# EAGLE board Sketch2 (EAGLE 7.5.0)
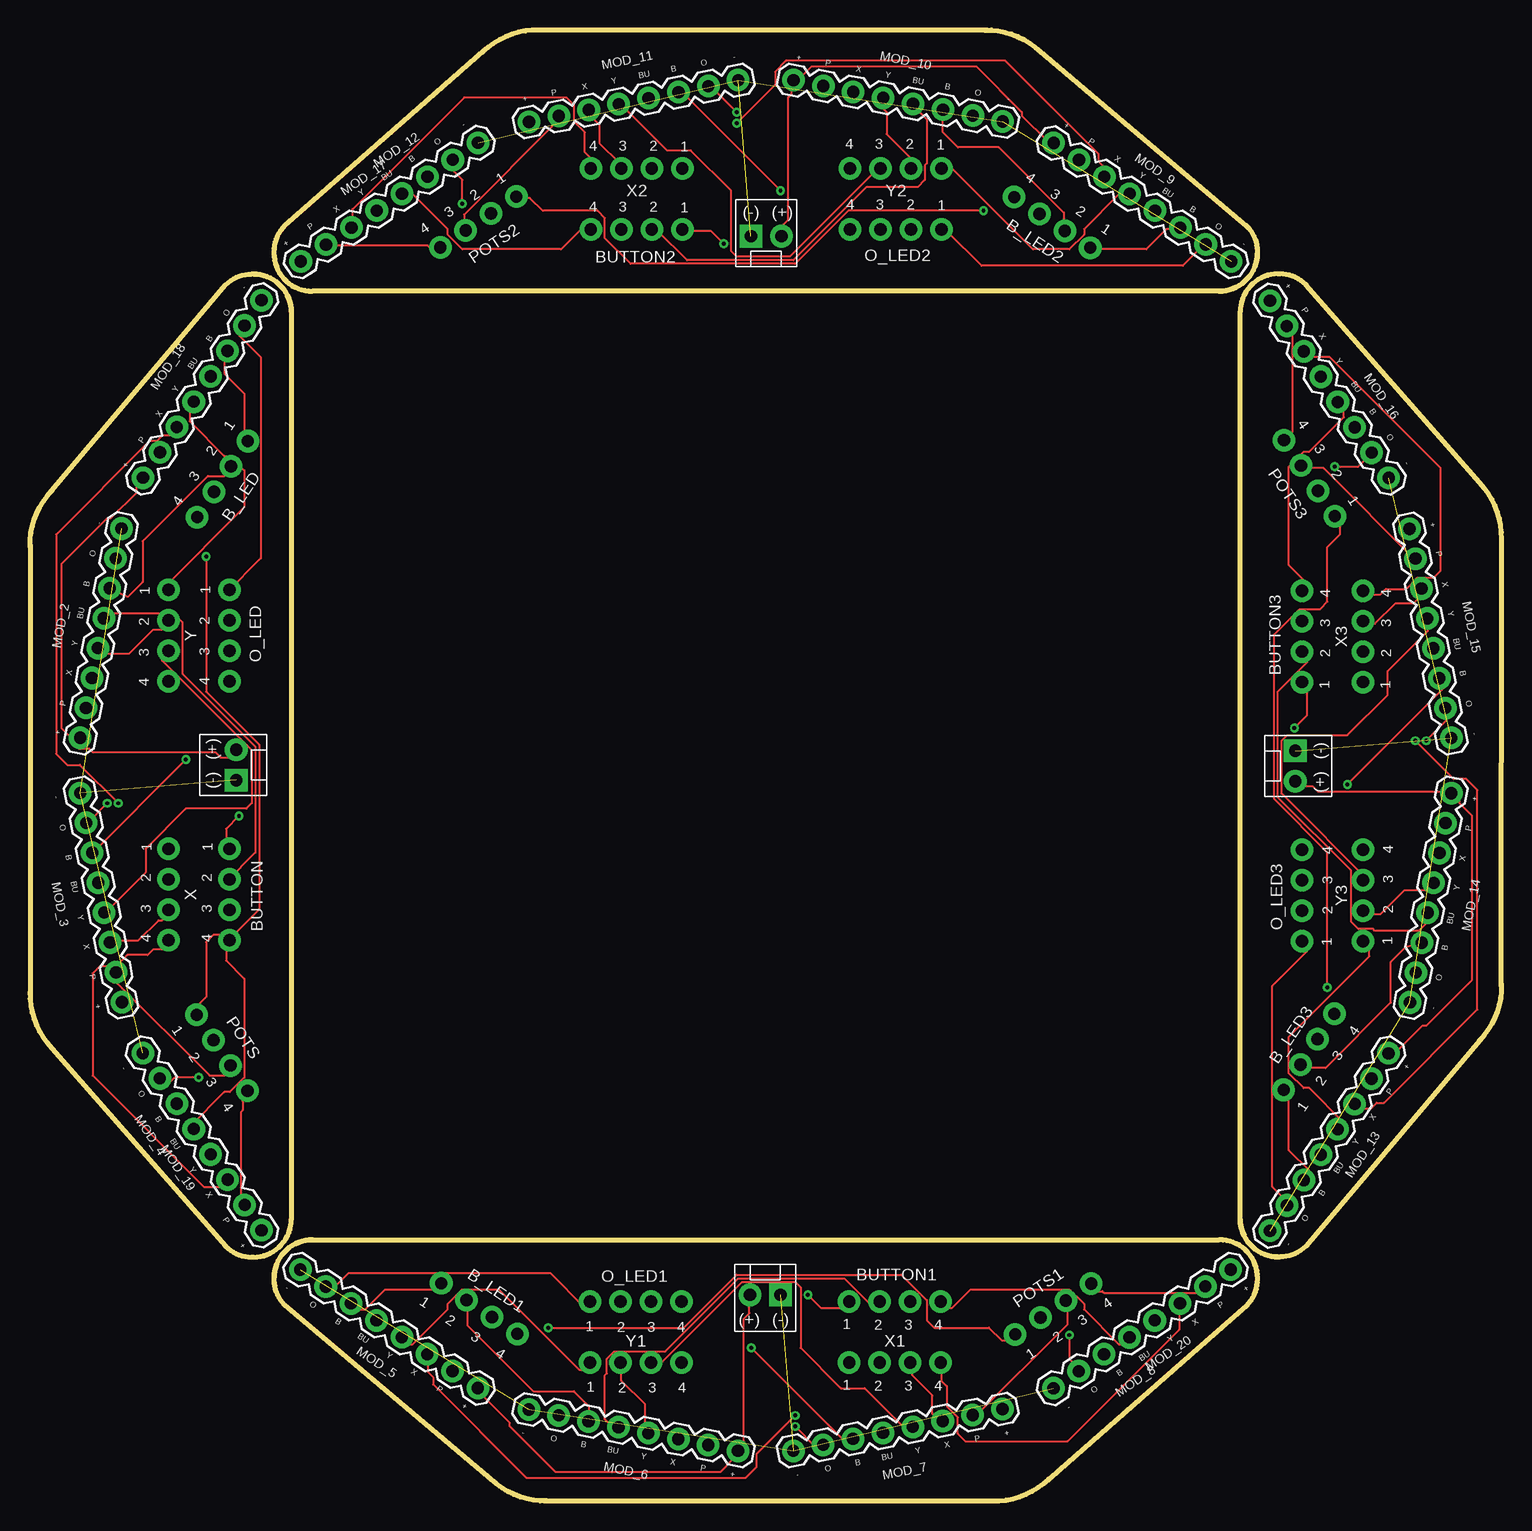
[diagram p0: board, top side]
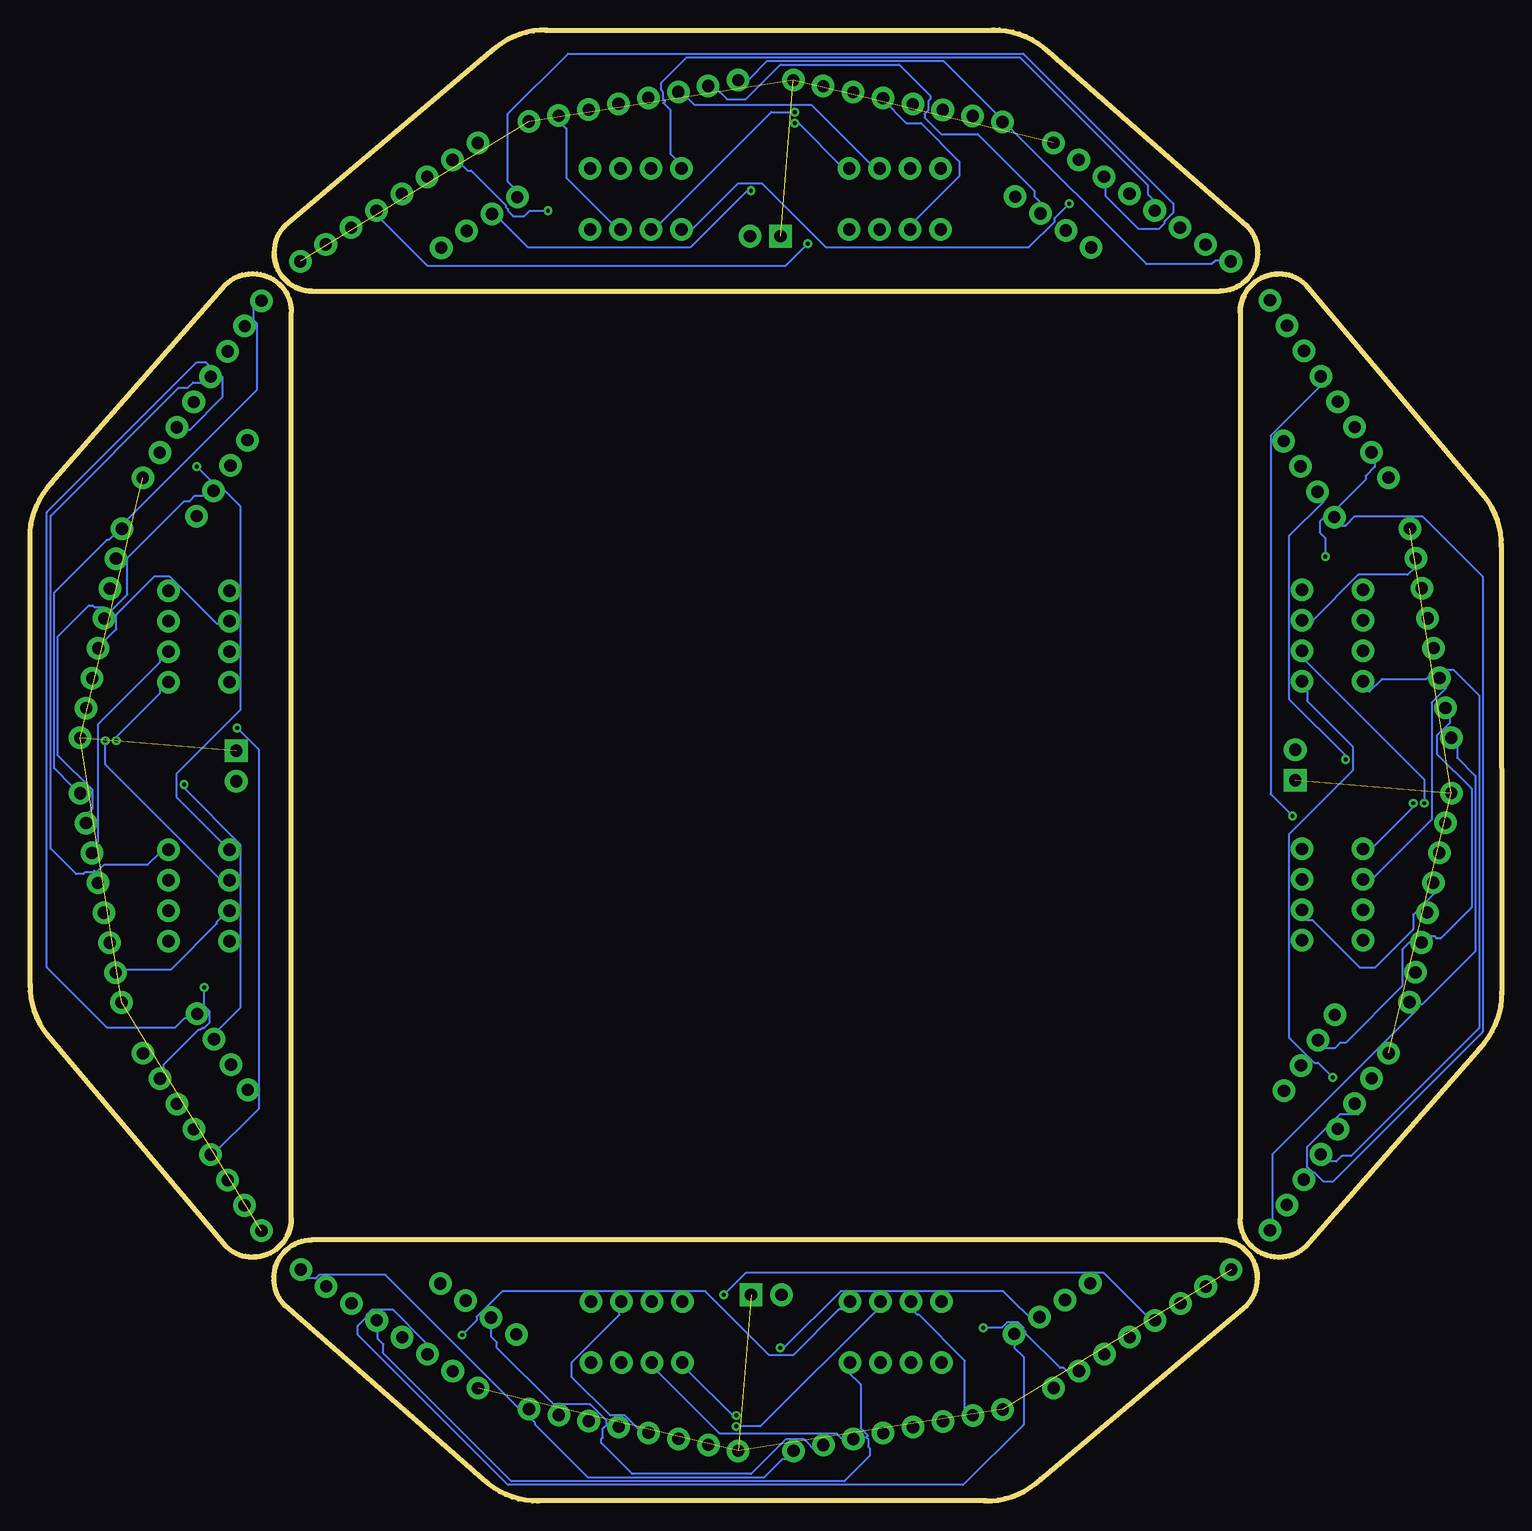
[diagram p1: board, bottom side, seen from below]

Size 122.63 x 122.62 mm. Coordinates in mm from the lower left corner, seen from the top.
Outline: 0,79.73 0,42.43
Outline: 0,42.43 0,42.24
Outline: 18.61,20.33 arc90 21.78,23.5 21.78,99.1
Outline: 21.78,99.1 arc90 18.61,102.27 arc-90 21.78,99.1
Outline: 0,42.43 arc45 1.82,37.75 16.31,21.23 arc45 18.48,20.33
Outline: 0,79.54 arc-45 1.82,84.22 16.31,101.38 arc-45 18.48,102.27
Outline: 42.89,0 80.2,0
Outline: 80.2,0 80.39,0
Outline: 102.3,18.61 arc90 99.12,21.78 23.53,21.78
Outline: 23.53,21.78 arc90 20.35,18.61 arc-90 23.53,21.78
Outline: 80.2,0 arc45 84.88,1.82 101.4,16.31 arc45 102.3,18.48
Outline: 43.08,0 arc-45 38.4,1.82 21.25,16.31 arc-45 20.35,18.48
Outline: 79.73,122.62 42.43,122.62
Outline: 42.43,122.62 42.24,122.62
Outline: 20.33,104.02 arc90 23.5,100.84 99.1,100.84
Outline: 99.1,100.84 arc90 102.27,104.02 arc-90 99.1,100.84
Outline: 42.43,122.62 arc45 37.75,120.8 21.23,106.31 arc45 20.33,104.15
Outline: 79.54,122.62 arc-45 84.22,120.8 101.37,106.31 arc-45 102.27,104.14
Outline: 122.62,42.89 122.63,80.2
Outline: 122.63,80.2 122.63,80.39
Outline: 104.02,102.3 arc90 100.84,99.12 100.84,23.53
Outline: 100.84,23.53 arc90 104.02,20.35 arc-90 100.84,23.53
Outline: 122.63,80.2 arc45 120.8,84.88 106.31,101.4 arc45 104.15,102.3
Outline: 122.62,43.08 arc-45 120.8,38.4 106.31,21.25 arc-45 104.15,20.35
Copper layers (1*16): Top 0.035mm / dielectric 1.5mm / Bottom 0.035mm
Design rules "default": minimum track width 10mil, minimum drill 24mil, track to track 8mil, track to pad 8mil, pad to pad 8mil, via to via 8mil, smd to smd 8mil, copper to edge 40mil, drill to drill 8mil, minimum pad ring 10mil, minimum via ring 8mil, stop-mask expansion 4mil, vias tented up to drill 0mil, thermal gap 10mil

## Footprints (pad centres in the part's own frame; a part is rotated, then mirrored left to right if it is on the bottom)
1X04_NO_SILK_ALL_ROUND = drill 1.016 pad 1.88: 1 0,0; 2 2.54,0; 3 5.08,0; 4 7.62,0
1X08_ROUND = drill 1.016 pad 1.88: 1 0,0; 2 2.54,0; 3 5.08,0; 4 7.62,0; 5 10.16,0; 6 12.7,0; 7 15.24,0; 8 17.78,0
MOLEX-1X2 = drill 1.016 pad 1.88 square: 1 0,0 | drill 1.016 pad 1.88: 2 2.54,0

## Placement (x,y rotation side)
B_LED  [1X04_NO_SILK_ALL_ROUND]  18.16,88.36 236.3 top
B_LED1  [1X04_NO_SILK_ALL_ROUND]  34.27,18.16 326.3 top
B_LED2  [1X04_NO_SILK_ALL_ROUND]  88.35,104.47 146.3 top
B_LED3  [1X04_NO_SILK_ALL_ROUND]  104.47,34.27 56.3 top
BUTTON  [1X04_NO_SILK_ALL_ROUND]  16.62,54.36 270 top
BUTTON1  [1X04_NO_SILK_ALL_ROUND]  68.26,16.62 0 top
BUTTON2  [1X04_NO_SILK_ALL_ROUND]  54.36,106.01 180 top
BUTTON3  [1X04_NO_SILK_ALL_ROUND]  106.01,68.26 90 top
MOD_2  [1X08_ROUND]  7.63,81.06 258.8 top
MOD_3  [1X08_ROUND]  4.18,59.02 281.3 top
MOD_4  [1X08_ROUND]  9.41,37.34 303.8 top
MOD_5  [1X08_ROUND]  22.53,19.29 326.3 top
MOD_6  [1X08_ROUND]  41.57,7.63 348.8 top
MOD_7  [1X08_ROUND]  63.61,4.18 11.3 top
MOD_8  [1X08_ROUND]  85.29,9.41 33.8 top
MOD_9  [1X08_ROUND]  100.09,103.34 146.3 top
MOD_10  [1X08_ROUND]  81.06,115 168.8 top
MOD_11  [1X08_ROUND]  59.02,118.44 191.3 top
MOD_12  [1X08_ROUND]  37.34,113.22 213.8 top
MOD_13  [1X08_ROUND]  103.34,22.53 56.3 top
MOD_14  [1X08_ROUND]  115,41.56 78.8 top
MOD_15  [1X08_ROUND]  118.44,63.61 101.3 top
MOD_16  [1X08_ROUND]  113.22,85.28 123.8 top
MOD_17  [1X08_ROUND]  37.34,113.22 213.8 top
MOD_18  [1X08_ROUND]  19.28,100.09 236.3 top
MOD_19  [1X08_ROUND]  9.41,37.34 303.8 top
MOD_20  [1X08_ROUND]  85.28,9.41 33.8 top
O_LED  [1X04_NO_SILK_ALL_ROUND]  16.62,75.95 270 top
O_LED1  [1X04_NO_SILK_ALL_ROUND]  46.67,16.62 0 top
O_LED2  [1X04_NO_SILK_ALL_ROUND]  75.95,106.01 180 top
O_LED3  [1X04_NO_SILK_ALL_ROUND]  106.01,46.67 90 top
POTS  [1X04_NO_SILK_ALL_ROUND]  13.88,40.53 303.8 top
POTS1  [1X04_NO_SILK_ALL_ROUND]  82.1,13.88 33.8 top
POTS2  [1X04_NO_SILK_ALL_ROUND]  40.52,108.74 213.8 top
POTS3  [1X04_NO_SILK_ALL_ROUND]  108.74,82.1 123.8 top
POWER  [MOLEX-1X2]  17.19,60.08 90 top
POWER1  [MOLEX-1X2]  62.54,17.19 180 top
POWER2  [MOLEX-1X2]  60.08,105.44 0 top
POWER3  [MOLEX-1X2]  105.44,62.54 270 top
X  [1X04_NO_SILK_ALL_ROUND]  11.54,54.36 270 top
X1  [1X04_NO_SILK_ALL_ROUND]  68.26,11.54 0 top
X2  [1X04_NO_SILK_ALL_ROUND]  54.36,111.09 180 top
X3  [1X04_NO_SILK_ALL_ROUND]  111.09,68.26 90 top
Y  [1X04_NO_SILK_ALL_ROUND]  11.54,75.95 270 top
Y1  [1X04_NO_SILK_ALL_ROUND]  46.67,11.54 0 top
Y2  [1X04_NO_SILK_ALL_ROUND]  75.95,111.09 180 top
Y3  [1X04_NO_SILK_ALL_ROUND]  111.09,46.67 90 top

## Library data of the parts
B_LED B_LED1-B_LED3 BUTTON BUTTON1-BUTTON3 O_LED O_LED1-O_LED3 POTS POTS1-POTS3 X X1-X3 Y Y1-Y3 = SparkFun-Connectors; PROD_ID: CONN-09696
MOD_2-MOD_20 = SparkFun-Connectors; PROD_ID: CONN-08437
POWER POWER1-POWER3 = SparkFun-Connectors

## Nets
5V: MOD_2.8 MOD_3.8 MOD_4.8 POWER.2
5V1: MOD_5.8 MOD_6.8 MOD_7.8 MOD_8.8 POWER1.2
5V2: MOD_9.8 MOD_10.8 MOD_11.8 MOD_12.8 POWER2.2
5V3: MOD_13.8 MOD_14.8 MOD_15.8 MOD_16.8 POWER3.2
5V5: MOD_19.8
5V6: MOD_20.8
GND: MOD_2.1 MOD_3.1 MOD_4.1 POWER.1
GND1: MOD_5.1 MOD_6.1 MOD_7.1 MOD_8.1 POWER1.1
GND2: MOD_9.1 MOD_10.1 MOD_11.1 MOD_12.1 POWER2.1
GND3: MOD_13.1 MOD_14.1 MOD_15.1 MOD_16.1 POWER3.1
GND5: MOD_20.1
M1_BTN: BUTTON.1
M1_BTN1: BUTTON1.1 MOD_5.4
M1_BTN2: BUTTON2.1 MOD_9.4
M1_BTN3: BUTTON3.1 MOD_13.4
M1_BTN4: MOD_17.4
M1_BTN5: MOD_19.4
M1_BTN6: MOD_20.4
M1_LED1: O_LED.1
M1_LED2: B_LED.1
M1_LED3: B_LED1.1 MOD_5.3
M1_LED4: MOD_5.2 O_LED1.1
M1_LED5: B_LED2.1 MOD_9.3
M1_LED6: MOD_9.2 O_LED2.1
M1_LED7: B_LED3.1 MOD_13.3
M1_LED8: MOD_13.2 O_LED3.1
M1_LED9: MOD_17.3
M1_LED10: MOD_17.2
M1_LED11: MOD_19.3
M1_LED12: MOD_19.2
M1_LED13: MOD_20.3
M1_LED14: MOD_20.2
M1_POT: POTS.1
M1_POT1: MOD_5.7 POTS1.1
M1_POT2: MOD_9.7 POTS2.1
M1_POT3: MOD_13.7 POTS3.1
M1_POT4: MOD_17.7
M1_POT5: MOD_19.7
M1_POT6: MOD_20.7
M1_X: X.1
M1_X1: MOD_5.6 X1.1
M1_X2: MOD_9.6 X2.1
M1_X3: MOD_13.6 X3.1
M1_X4: MOD_17.6
M1_X5: MOD_19.6
M1_X6: MOD_20.6
M1_Y: Y.1
M1_Y1: MOD_5.5 Y1.1
M1_Y2: MOD_9.5 Y2.1
M1_Y3: MOD_13.5 Y3.1
M1_Y4: MOD_17.5
M1_Y5: MOD_19.5
M1_Y6: MOD_20.5
M2_BTN: BUTTON.2 MOD_2.4
M2_BTN1: BUTTON1.2 MOD_6.4
M2_BTN2: BUTTON2.2 MOD_10.4
M2_BTN3: BUTTON3.2 MOD_14.4
M2_BTN4: MOD_18.4
M2_LED1: MOD_2.2 O_LED.2
M2_LED2: B_LED.2 MOD_2.3
M2_LED3: B_LED1.2 MOD_6.3
M2_LED4: MOD_6.2 O_LED1.2
M2_LED5: B_LED2.2 MOD_10.3
M2_LED6: MOD_10.2 O_LED2.2
M2_LED7: B_LED3.2 MOD_14.3
M2_LED8: MOD_14.2 O_LED3.2
M2_LED9: MOD_18.3
M2_LED10: MOD_18.2
M2_POT: MOD_2.7 POTS.2
M2_POT1: MOD_6.7 POTS1.2
M2_POT2: MOD_10.7 POTS2.2
M2_POT3: MOD_14.7 POTS3.2
M2_POT4: MOD_18.7
M2_X: MOD_2.6 X.2
M2_X1: MOD_6.6 X1.2
M2_X2: MOD_10.6 X2.2
M2_X3: MOD_14.6 X3.2
M2_X4: MOD_18.6
M2_Y: MOD_2.5 Y.2
M2_Y1: MOD_6.5 Y1.2
M2_Y2: MOD_10.5 Y2.2
M2_Y3: MOD_14.5 Y3.2
M2_Y4: MOD_18.5
M3_BTN: BUTTON.3 MOD_3.4
M3_BTN1: BUTTON1.3 MOD_7.4
M3_BTN2: BUTTON2.3 MOD_11.4
M3_BTN3: BUTTON3.3 MOD_15.4
M3_LED1: MOD_3.2 O_LED.3
M3_LED2: B_LED.3 MOD_3.3
M3_LED3: B_LED1.3 MOD_7.3
M3_LED4: MOD_7.2 O_LED1.3
M3_LED5: B_LED2.3 MOD_11.3
M3_LED6: MOD_11.2 O_LED2.3
M3_LED7: B_LED3.3 MOD_15.3
M3_LED8: MOD_15.2 O_LED3.3
M3_POT: MOD_3.7 POTS.3
M3_POT1: MOD_7.7 POTS1.3
M3_POT2: MOD_11.7 POTS2.3
M3_POT3: MOD_15.7 POTS3.3
M3_X: MOD_3.6 X.3
M3_X1: MOD_7.6 X1.3
M3_X2: MOD_11.6 X2.3
M3_X3: MOD_15.6 X3.3
M3_Y: MOD_3.5 Y.3
M3_Y1: MOD_7.5 Y1.3
M3_Y2: MOD_11.5 Y2.3
M3_Y3: MOD_15.5 Y3.3
M4_BTN: BUTTON.4 MOD_4.4
M4_BTN1: BUTTON1.4 MOD_8.4
M4_BTN2: BUTTON2.4 MOD_12.4
M4_BTN3: BUTTON3.4 MOD_16.4
M4_LED1: MOD_4.2 O_LED.4
M4_LED2: B_LED.4 MOD_4.3
M4_LED3: B_LED1.4 MOD_8.3
M4_LED4: MOD_8.2 O_LED1.4
M4_LED5: B_LED2.4 MOD_12.3
M4_LED6: MOD_12.2 O_LED2.4
M4_LED7: B_LED3.4 MOD_16.3
M4_LED8: MOD_16.2 O_LED3.4
M4_POT: MOD_4.7 POTS.4
M4_POT1: MOD_8.7 POTS1.4
M4_POT2: MOD_12.7 POTS2.4
M4_POT3: MOD_16.7 POTS3.4
M4_X: MOD_4.6 X.4
M4_X1: MOD_8.6 X1.4
M4_X2: MOD_12.6 X2.4
M4_X3: MOD_16.6 X3.4
M4_Y: MOD_4.5 Y.4
M4_Y1: MOD_8.5 Y1.4
M4_Y2: MOD_12.5 Y2.4
M4_Y3: MOD_16.5 Y3.4

## Tracks (layer width: path | path; a pad name or v marks a point on that pad's centre or on a via)
5V
  Top 0.152: POWER.2 16.65,61.98 15.89,61.98 15.43,62.43 5.22,62.43 4.92,62.74 4,62.74 3.85,62.89 MOD_2.8 3.7,63.04 3.7,63.35 2.63,64.42 2.63,78.13 6.44,81.94 6.75,81.94 8.88,84.07 8.88,84.53 9.42,85.3
  Bottom 0.152: MOD_4.8 18.79,21.9 18.79,23.11 19.09,23.42 19.09,28.91 7.2,40.79 MOD_3.8 7.2,40.95 6.75,41.4 6.6,41.4 2.18,45.82 2.18,60.45 3.7,61.98 3.7,62.89 MOD_2.8
5V1
  Top 0.152: POWER1.2 59.95,16.42 59.95,15.66 59.49,15.21 59.49,4.99 59.19,4.69 59.19,3.78 59.04,3.62 MOD_6.8 58.88,3.47 58.58,3.47 57.51,2.4 43.8,2.4 39.99,6.21 39.99,6.52 37.85,8.65 37.39,8.65 MOD_5.8
  Bottom 0.152: MOD_8.8 100.03,18.56 98.81,18.56 98.51,18.86 93.02,18.86 81.13,6.98 MOD_7.8 80.98,6.98 80.52,6.52 80.52,6.37 76.1,1.95 61.47,1.95 59.95,3.47 59.04,3.47 MOD_6.8
5V2
  Top 0.152: POWER2.2 62.69,105.57 62.69,106.33 63.15,106.79 63.15,117 63.46,117.3 63.46,118.22 63.61,118.37 MOD_10.8 63.76,118.52 64.07,118.52 65.13,119.59 78.85,119.59 82.66,115.78 82.66,115.47 84.79,113.34 85.25,113.34 MOD_9.8
  Bottom 0.152: MOD_12.8 22.61,103.43 23.83,103.43 24.14,103.13 29.62,103.13 41.51,115.02 MOD_11.8 41.66,115.02 42.12,115.47 42.12,115.63 46.54,120.05 61.17,120.05 62.69,118.52 63.61,118.52 MOD_10.8
5V3
  Top 0.152: POWER3.2 106.13,59.57 106.89,59.57 107.35,59.11 117.56,59.11 117.87,58.81 118.78,58.81 118.93,58.65 MOD_14.8 119.09,58.5 119.09,58.2 120.15,57.13 120.15,43.41 116.34,39.6 116.04,39.6 113.9,37.47 113.9,37.01 MOD_13.8
  Bottom 0.152: MOD_16.8 104,99.65 104,98.43 103.69,98.13 103.69,92.64 115.58,80.75 MOD_15.8 115.58,80.6 116.04,80.14 116.19,80.14 120.61,75.72 120.61,61.09 119.09,59.57 119.09,58.65 MOD_14.8
GND  (3 unrouted)
GND1  (4 unrouted)
GND2  (4 unrouted)
GND3  (4 unrouted)
M1_BTN  (via drill 0.33)
  Top 0.152: v17.42,57.1 16.35,56.03 16.35,53.75 BUTTON.1
  Bottom 0.152: v17.42,57.1 19.24,58.93 19.24,88.8 15.13,92.91 14.67,92.91 15.06,93.75
M1_BTN1  (via drill 0.33)
  Top 0.152: v64.83,17.19 65.89,16.12 68.18,16.12 BUTTON1.1
  Bottom 0.152: v64.83,17.19 63,19.02 33.13,19.02 29.01,14.9 29.01,14.44 MOD_5.4
M1_BTN2  (via drill 0.33)
  Top 0.152: v57.82,104.81 56.75,105.87 54.47,105.87 BUTTON2.1
  Bottom 0.152: v57.82,104.81 59.65,102.98 89.52,102.98 93.63,107.09 93.63,107.55 MOD_9.4
M1_BTN3  (via drill 0.33)
  Top 0.152: v105.37,64.45 106.44,65.51 106.44,67.8 BUTTON3.1
  Bottom 0.152: v105.37,64.45 103.54,62.62 103.54,32.75 107.66,28.63 108.11,28.63 MOD_13.4
M1_LED1
  Top 0.152: O_LED.1 16.35,75.24 16.35,75.69 19.24,78.59 19.24,95.35 17.42,97.18 17.88,97.98
M1_LED2
  Top 0.152: B_LED.1 17.87,87.73 17.87,92.3 16.2,93.98 16.2,95.05 16.47,95.87
M1_LED3
  Top 0.152: B_LED1.1 34.19,17.64 29.62,17.64 27.95,15.97 26.88,15.97 MOD_5.3
M1_LED4
  Top 0.152: O_LED1.1 46.69,16.12 46.23,16.12 43.34,19.02 26.57,19.02 24.75,17.19 MOD_5.2
M1_LED5
  Top 0.152: B_LED2.1 88.45,104.35 93.02,104.35 94.7,106.03 95.77,106.03 MOD_9.3
M1_LED6
  Top 0.152: O_LED2.1 75.95,105.87 76.41,105.87 79.31,102.98 96.07,102.98 97.9,104.81 MOD_9.2
M1_LED7
  Top 0.152: B_LED3.1 104.91,33.81 104.91,29.24 106.59,27.56 106.59,26.5 MOD_13.3
M1_LED8
  Top 0.152: O_LED3.1 106.44,46.31 106.44,45.85 103.54,42.96 103.54,26.19 105.37,24.36 MOD_13.2
M1_POT  (via drill 0.33)
  Top 0.152: v14.67,78.74 14.67,67.46 19.09,63.04 19.09,49.33 16.96,47.19 15.28,47.19 14.67,46.58 14.67,42.01 13.61,40.95 13.61,39.88 POTS.1
  Bottom 0.152: v14.67,78.74 14.67,80.26 15.13,80.72 15.13,81.64 14.67,82.09 14.52,82.09 14.37,82.25 14.22,82.25 11.32,85.14 11.32,85.45 10.56,86.21 10.56,86.67 10.83,87.41
M1_POT1  (via drill 0.33)
  Top 0.152: v43.19,14.44 54.46,14.44 58.88,18.86 72.6,18.86 74.73,16.73 74.73,15.05 75.34,14.44 79.91,14.44 80.98,13.38 82.05,13.38 POTS1.1
  Bottom 0.152: v43.19,14.44 41.66,14.44 41.2,14.9 40.29,14.9 39.83,14.44 39.83,14.29 39.68,14.14 39.68,13.99 36.78,11.09 36.48,11.09 35.72,10.33 35.26,10.33 MOD_5.7
M1_POT2  (via drill 0.33)
  Top 0.152: v79.46,107.55 68.18,107.55 63.76,103.13 50.05,103.13 47.91,105.26 47.91,106.94 47.3,107.55 42.73,107.55 41.66,108.62 40.6,108.62 POTS2.1
  Bottom 0.152: v79.46,107.55 80.98,107.55 81.44,107.09 82.35,107.09 82.81,107.55 82.81,107.7 82.96,107.85 82.96,108.01 85.86,110.9 86.16,110.9 86.93,111.66 87.38,111.66 MOD_9.7
M1_POT3  (via drill 0.33)
  Top 0.152: v108.11,42.8 108.11,54.08 103.69,58.5 103.69,72.22 105.83,74.35 107.5,74.35 108.11,74.96 108.11,79.53 109.18,80.6 109.18,81.67 POTS3.1
  Bottom 0.152: v108.11,42.8 108.11,41.28 107.66,40.82 107.66,39.91 108.11,39.45 108.27,39.45 108.42,39.3 108.57,39.3 111.47,36.4 111.47,36.1 112.23,35.34 112.23,34.88 MOD_13.7
M1_X  (via drill 0.33)
  Top 0.152: v7.36,58.17 4.16,61.37 3.09,61.37 2.18,62.28 2.18,80.57 9.95,88.34 10.56,88.34 11.01,88.8 11.78,88.8 12.24,89.53
  Bottom 0.152: v7.36,58.17 7.36,57.86 11.01,54.2 11.01,53.75 X.1
M1_X1  (via drill 0.33)
  Top 0.152: v63.76,7.13 60.56,3.93 60.56,2.86 59.64,1.95 41.36,1.95 33.58,9.72 33.58,10.33 33.13,10.79 33.13,11.55 MOD_5.6
  Bottom 0.152: v63.76,7.13 64.06,7.13 67.72,10.79 68.18,10.79 X1.1
M1_X2  (via drill 0.33)
  Top 0.152: v58.88,114.86 62.09,118.07 62.09,119.13 63,120.05 81.29,120.05 89.06,112.27 89.06,111.66 89.52,111.21 89.52,110.45 MOD_9.6
  Bottom 0.152: v58.88,114.86 58.58,114.86 54.92,111.21 54.47,111.21 X2.1
M1_X3  (via drill 0.33)
  Top 0.152: v115.43,63.38 118.63,60.18 119.7,60.18 120.61,59.26 120.61,40.98 112.84,33.2 112.23,33.2 111.77,32.75 111.01,32.75 MOD_13.6
  Bottom 0.152: v115.43,63.38 115.43,63.68 111.77,67.34 111.77,67.8 X3.1
M1_Y
  Top 0.152: Y.1 11.17,75.24 11.17,76.15 17.87,82.86 17.87,85.9 16.65,87.12 16.2,87.12 13.3,90.02 13.3,90.78 13.65,91.64
M1_Y1
  Top 0.152: Y1.1 46.69,10.94 45.78,10.94 39.07,17.64 36.02,17.64 34.8,16.42 34.8,15.97 31.91,13.07 31.15,13.07 MOD_5.5
M1_Y2
  Top 0.152: Y2.1 75.95,111.05 76.87,111.05 83.57,104.35 86.62,104.35 87.84,105.57 87.84,106.03 90.74,108.92 91.5,108.92 MOD_9.5
M1_Y3
  Top 0.152: Y3.1 111.62,46.31 111.62,45.4 104.91,38.69 104.91,35.64 106.13,34.42 106.59,34.42 109.48,31.53 109.48,30.77 MOD_13.5
M2_BTN
  Top 0.152: BUTTON.2 16.35,51.16 16.35,51.61 18.79,54.05 18.79,62.89 12.69,68.99 12.69,73.25 12.08,73.86 10.86,73.86 10.71,74.02 7.05,74.02 5.83,72.8 MOD_2.4
M2_BTN1
  Top 0.152: BUTTON1.2 70.77,16.12 70.31,16.12 67.87,18.56 59.04,18.56 52.94,12.46 48.67,12.46 48.06,11.85 48.06,10.63 47.91,10.48 47.91,6.82 49.13,5.6 MOD_6.4
M2_BTN2
  Top 0.152: BUTTON2.2 51.87,105.87 52.33,105.87 54.77,103.43 63.61,103.43 69.71,109.53 73.97,109.53 74.58,110.14 74.58,111.36 74.73,111.51 74.73,115.17 73.52,116.39 MOD_10.4
M2_BTN3
  Top 0.152: BUTTON3.2 106.44,70.39 106.44,69.93 104,67.49 104,58.65 110.09,52.56 110.09,48.29 110.7,47.68 111.92,47.68 112.08,47.53 115.73,47.53 116.95,48.75 MOD_14.4
M2_LED1
  Bottom 0.152: O_LED.2 16.2,72.8 15.74,73.25 15.74,73.41 11.93,77.22 7.81,77.22 7.2,77.83 6.75,77.83 MOD_2.2
M2_LED2
  Top 0.152: B_LED.2 16.2,85.45 14.82,85.45 9.38,80 9.38,76.61 8.13,75.36 MOD_2.3 6.29,75.24
M2_LED3
  Top 0.152: B_LED1.2 36.48,15.97 36.48,14.6 41.93,9.15 45.32,9.15 46.57,7.9 MOD_6.3 46.69,6.06
M2_LED4
  Bottom 0.152: O_LED1.2 49.13,15.97 48.67,15.51 48.52,15.51 44.71,11.7 44.71,7.59 44.1,6.98 44.1,6.52 MOD_6.2
M2_LED5
  Top 0.152: B_LED2.2 86.16,106.03 86.16,107.4 80.72,112.84 77.33,112.84 76.08,114.1 MOD_10.3 75.95,115.93
M2_LED6
  Bottom 0.152: O_LED2.2 73.52,106.03 73.97,106.48 74.12,106.48 77.93,110.29 77.93,114.41 78.54,115.02 78.54,115.47 MOD_10.2
M2_LED7
  Top 0.152: B_LED3.2 106.59,36.1 107.96,36.1 113.41,41.55 113.41,44.94 114.66,46.19 MOD_14.3 116.5,46.31
M2_LED8
  Bottom 0.152: O_LED3.2 106.59,48.75 107.05,48.29 107.05,48.14 110.86,44.33 114.97,44.33 115.58,43.72 116.04,43.72 MOD_14.2
M2_POT
  Bottom 0.152: POTS.2 14.82,37.75 13.91,37.75 13.45,38.2 13,38.2 8.27,42.93 8.27,45.97 6.9,47.35 6.6,47.35 6.29,47.04 5.53,47.04 5.38,46.89 5.07,46.89 2.48,49.48 2.48,59.39 5.38,62.28 5.38,63.81 4.31,64.87 4.31,65.33 MOD_2.7
M2_POT1
  Bottom 0.152: POTS1.2 84.18,14.6 84.18,13.68 83.72,13.22 83.72,12.77 79,8.04 75.95,8.04 74.58,6.67 74.58,6.37 74.88,6.06 74.88,5.3 75.04,5.15 75.04,4.84 72.45,2.25 62.54,2.25 59.64,5.15 58.12,5.15 57.05,4.08 56.6,4.08 MOD_6.7
M2_POT2
  Bottom 0.152: POTS2.2 38.46,107.4 38.46,108.31 38.92,108.77 38.92,109.23 43.64,113.95 46.69,113.95 48.06,115.32 48.06,115.63 47.76,115.93 47.76,116.69 47.61,116.85 47.61,117.15 50.2,119.74 60.1,119.74 63,116.85 64.52,116.85 65.59,117.91 66.05,117.91 MOD_10.7
M2_POT3
  Bottom 0.152: POTS3.2 107.96,83.8 108.88,83.8 109.33,83.34 109.79,83.34 114.51,78.62 114.51,75.57 115.89,74.2 116.19,74.2 116.5,74.5 117.26,74.5 117.41,74.66 117.71,74.66 120.31,72.07 120.31,62.16 117.41,59.26 117.41,57.74 118.48,56.67 118.48,56.22 MOD_14.7
M2_X
  Bottom 0.152: X.2 11.01,51.16 11.01,51.61 5.83,56.8 5.83,66.55 4.61,67.77 MOD_2.6
M2_X1
  Bottom 0.152: X1.2 70.77,10.79 70.31,10.79 65.13,5.6 55.38,5.6 54.16,4.38 MOD_6.6
M2_X2
  Bottom 0.152: X2.2 51.87,111.21 52.33,111.21 57.51,116.39 67.27,116.39 68.49,117.61 MOD_10.6
M2_X3
  Bottom 0.152: X3.2 111.77,70.39 111.77,69.93 116.95,64.75 116.95,55 118.17,53.78 MOD_14.6
M2_Y
  Top 0.152: Y.2 11.01,72.64 10.25,72.64 8.27,70.66 6.44,70.66 6.14,70.36 5.38,70.36 MOD_2.5
M2_Y1
  Top 0.152: Y1.2 49.28,10.79 49.28,10.02 51.26,8.04 51.26,6.21 51.57,5.91 51.57,5.15 MOD_6.5
M2_Y2
  Top 0.152: Y2.2 73.36,111.21 73.36,111.97 71.38,113.95 71.38,115.78 71.08,116.08 71.08,116.85 MOD_10.5
M2_Y3
  Top 0.152: Y3.2 111.77,48.9 112.53,48.9 114.51,50.88 116.34,50.88 116.65,51.19 117.41,51.19 MOD_14.5
M3_BTN
  Bottom 0.152: BUTTON.3 16.2,48.41 15.74,48.41 11.78,44.45 10.56,44.45 7.36,47.65 7.36,48.87 5.38,50.85 MOD_3.4
M3_BTN1
  Bottom 0.152: BUTTON1.3 73.51,15.97 73.51,15.51 77.48,11.55 77.48,10.33 74.28,7.13 73.06,7.13 71.07,5.15 MOD_7.4
M3_BTN2
  Bottom 0.152: BUTTON2.3 49.13,106.03 49.13,106.48 45.17,110.45 45.17,111.66 48.37,114.86 49.59,114.86 51.57,116.85 MOD_11.4
M3_BTN3
  Bottom 0.152: BUTTON3.3 106.59,73.13 107.05,73.13 111.01,77.09 112.23,77.09 115.43,73.89 115.43,72.68 117.41,70.69 MOD_15.4
M3_LED1  (via drill 0.33)
  Top 0.152: v6.44,58.17 4.77,56.49 4.77,56.34 4.31,55.88 MOD_3.2
  Bottom 0.152: v6.44,58.17 6.44,60.15 16.35,70.05 O_LED.3
M3_LED2  (via drill 0.33)
  Top 0.152: v13,61.82 4.92,53.75 4.92,53.44 MOD_3.3
  Bottom 0.152: v13,61.82 13,62.13 17.72,66.85 17.72,80.42 14.82,83.31 B_LED.3
M3_LED3  (via drill 0.33)
  Top 0.152: v60.1,12.77 68.18,4.69 68.48,4.69 MOD_7.3
  Bottom 0.152: v60.1,12.77 59.8,12.77 55.07,17.49 41.51,17.49 38.61,14.6 B_LED1.3
M3_LED4  (via drill 0.33)
  Top 0.152: v63.76,6.21 65.44,4.54 65.59,4.54 66.05,4.08 MOD_7.2
  Bottom 0.152: v63.76,6.21 61.78,6.21 51.87,16.12 O_LED1.3
M3_LED5  (via drill 0.33)
  Top 0.152: v62.54,109.23 54.47,117.3 54.16,117.3 MOD_11.3
  Bottom 0.152: v62.54,109.23 62.85,109.23 67.57,104.5 81.14,104.5 84.03,107.4 B_LED2.3
M3_LED6  (via drill 0.33)
  Top 0.152: v58.88,115.78 57.21,117.46 57.06,117.46 56.6,117.91 MOD_11.2
  Bottom 0.152: v58.88,115.78 60.87,115.78 70.77,105.87 O_LED2.3
M3_LED7  (via drill 0.33)
  Top 0.152: v109.79,59.72 117.87,67.8 117.87,68.1 MOD_15.3
  Bottom 0.152: v109.79,59.72 109.79,59.42 105.07,54.69 105.07,41.13 107.96,38.23 B_LED3.3
M3_LED8  (via drill 0.33)
  Top 0.152: v116.34,63.38 118.02,65.06 118.02,65.21 118.48,65.66 MOD_15.2
  Bottom 0.152: v116.34,63.38 116.34,61.4 106.44,51.49 O_LED3.3
M3_POT
  Top 0.152: POTS.3 16.2,35.46 14.98,35.46 7.2,43.23 6.9,43.23 MOD_3.7
M3_POT1
  Top 0.152: POTS1.3 86.47,15.97 86.47,14.75 78.69,6.98 78.69,6.67 MOD_7.7
M3_POT2
  Top 0.152: POTS2.3 36.18,106.03 36.18,107.24 43.95,115.02 43.95,115.32 MOD_11.7
M3_POT3
  Top 0.152: POTS3.3 106.59,86.09 107.81,86.09 115.58,78.31 115.89,78.31 MOD_15.7
M3_X
  Top 0.152: X.3 11.01,48.41 10.71,48.41 9.03,46.74 7.51,46.74 6.75,45.97 6.29,45.97 MOD_3.6
M3_X1
  Top 0.152: X1.3 73.51,10.79 73.51,10.48 75.19,8.8 75.19,7.28 75.95,6.52 75.95,6.06 MOD_7.6
M3_X2
  Top 0.152: X2.3 49.13,111.21 49.13,111.51 47.45,113.19 47.45,114.71 46.69,115.47 46.69,115.93 MOD_11.6
M3_X3
  Top 0.152: X3.3 111.77,73.13 112.08,73.13 113.75,74.81 115.28,74.81 116.04,75.57 116.5,75.57 MOD_15.6
M3_Y
  Top 0.152: MOD_3.5 5.83,48.41 6.29,48.87 6.29,49.02 9.64,52.38 9.64,54.36 13,57.71 18.03,57.71 18.48,58.17 18.48,62.59 11.01,70.05 Y.3
M3_Y1
  Top 0.152: MOD_7.5 73.51,5.6 73.06,6.06 72.9,6.06 69.55,9.41 67.57,9.41 64.22,12.77 64.22,17.8 63.76,18.25 59.34,18.25 51.87,10.79 Y1.3
M3_Y2
  Top 0.152: MOD_11.5 49.13,116.39 49.59,115.93 49.74,115.93 53.09,112.58 55.07,112.58 58.43,109.23 58.43,104.2 58.88,103.74 63.3,103.74 70.77,111.21 Y2.3
M3_Y3
  Top 0.152: MOD_15.5 116.95,73.13 116.5,72.68 116.5,72.52 113.14,69.17 113.14,67.19 109.79,63.84 104.76,63.84 104.3,63.38 104.3,58.96 111.77,51.49 Y3.3
M4_BTN
  Top 0.152: MOD_4.4 13.3,30.43 13.3,31.19 16.2,34.09 16.65,34.09 17.87,35.31 17.87,43.54 16.35,45.06 16.35,45.97 BUTTON.4
M4_BTN1
  Top 0.152: MOD_8.4 91.5,13.07 90.73,13.07 87.84,15.97 87.84,16.42 86.62,17.64 78.39,17.64 76.87,16.12 75.95,16.12 BUTTON1.4
M4_BTN2
  Top 0.152: MOD_12.4 31.15,108.92 31.91,108.92 34.81,106.03 34.81,105.57 36.02,104.35 44.25,104.35 45.78,105.87 46.69,105.87 BUTTON2.4
M4_BTN3
  Top 0.152: MOD_16.4 109.48,91.12 109.48,90.35 106.59,87.46 106.13,87.46 104.91,86.24 104.91,78.01 106.44,76.49 106.44,75.57 BUTTON3.4
M4_LED1  (via drill 0.33)
  Top 0.152: v14.06,35.31 12.08,35.31 11.32,34.54 10.56,34.54 MOD_4.2
  Bottom 0.152: v14.06,35.31 15.28,36.53 15.59,36.53 17.72,38.66 17.72,55.58 12.39,60.91 12.39,62.89 16.2,66.7 16.2,67.46 O_LED.4
M4_LED2
  Bottom 0.152: MOD_4.3 11.93,32.26 13.45,32.26 16.2,29.52 16.2,27.84 15.74,27.38 15.59,27.38 14.82,26.62 14.06,26.62 1.57,39.12 1.57,77.06 6.6,82.09 12.23,82.09 13,81.33 13.45,81.33 B_LED.4
M4_LED3
  Bottom 0.152: MOD_8.3 89.67,11.7 89.67,13.22 92.41,15.97 94.09,15.97 94.54,15.51 94.54,15.36 95.31,14.6 95.31,13.83 82.81,1.34 44.86,1.34 39.83,6.37 39.83,12 40.59,12.77 40.59,13.22 B_LED1.4
M4_LED4  (via drill 0.33)
  Top 0.152: v86.62,13.83 86.62,11.85 87.38,11.09 87.38,10.33 MOD_8.2
  Bottom 0.152: v86.62,13.83 85.4,15.05 85.4,15.36 83.27,17.49 66.35,17.49 61.02,12.16 59.04,12.16 55.23,15.97 54.46,15.97 O_LED1.4
M4_LED5
  Bottom 0.152: MOD_12.3 32.98,110.29 32.98,108.77 30.23,106.03 28.56,106.03 28.1,106.48 28.1,106.64 27.34,107.4 27.34,108.16 39.83,120.66 77.78,120.66 82.81,115.63 82.81,109.99 82.05,109.23 82.05,108.77 B_LED2.4
M4_LED6  (via drill 0.33)
  Top 0.152: v36.02,108.16 36.02,110.14 35.26,110.9 35.26,111.66 MOD_12.2
  Bottom 0.152: v36.02,108.16 37.24,106.94 37.24,106.64 39.38,104.5 56.29,104.5 61.63,109.84 63.61,109.84 67.42,106.03 68.18,106.03 O_LED2.4
M4_LED7
  Bottom 0.152: MOD_16.3 110.86,89.29 109.33,89.29 106.59,92.03 106.59,93.71 107.05,94.16 107.2,94.16 107.96,94.93 108.72,94.93 121.22,82.43 121.22,44.48 116.19,39.45 110.55,39.45 109.79,40.21 109.33,40.21 B_LED3.4
M4_LED8  (via drill 0.33)
  Top 0.152: v108.72,86.24 110.7,86.24 111.47,87 112.23,87 MOD_16.2
  Bottom 0.152: v108.72,86.24 107.5,85.02 107.2,85.02 105.07,82.89 105.07,65.97 110.4,60.64 110.4,58.65 106.59,54.84 106.59,54.08 O_LED3.4
M4_POT
  Top 0.152: MOD_4.7 17.57,24.03 17.57,32.41 17.72,32.56 17.72,33.33 POTS.4
M4_POT1
  Top 0.152: MOD_8.7 97.9,17.34 89.52,17.34 89.36,17.49 88.6,17.49 POTS1.4
M4_POT2
  Top 0.152: MOD_12.7 24.75,104.65 33.13,104.65 33.28,104.5 34.04,104.5 POTS2.4
M4_POT3
  Top 0.152: MOD_16.7 105.22,97.52 105.22,89.13 105.07,88.98 105.07,88.22 POTS3.4
M4_X
  Top 0.152: MOD_4.6 16.04,26.16 14.52,26.16 5.22,35.46 5.22,43.99 5.83,44.6 7.2,44.6 8.12,45.52 9.8,45.52 10.25,45.97 11.01,45.97 X.4
M4_X1
  Top 0.152: MOD_8.6 95.76,15.81 95.76,14.29 86.47,4.99 77.93,4.99 77.32,5.6 77.32,6.98 76.41,7.89 76.41,9.57 75.95,10.02 75.95,10.79 X1.4
M4_X2
  Top 0.152: MOD_12.6 26.88,106.18 26.88,107.7 36.18,117 44.71,117 45.32,116.39 45.32,115.02 46.24,114.1 46.24,112.43 46.69,111.97 46.69,111.21 X2.4
M4_X3
  Top 0.152: MOD_16.6 106.74,95.38 108.27,95.38 117.56,86.09 117.56,77.55 116.95,76.94 115.58,76.94 114.67,76.03 112.99,76.03 112.53,75.57 111.77,75.57 X3.4
M4_Y
  Bottom 0.152: MOD_4.5 14.52,28.3 13.76,28.3 13.3,28.75 12.54,28.75 1.87,39.42 1.87,67.16 4,69.29 4.61,69.29 4.77,69.14 5.38,69.14 5.53,68.99 5.68,69.14 6.29,68.53 9.95,68.53 11.01,67.46 Y.4
M4_Y1
  Bottom 0.152: MOD_8.5 93.63,14.29 93.63,13.53 93.17,13.07 93.17,12.31 82.5,1.64 54.77,1.64 52.63,3.78 52.63,4.38 52.79,4.54 52.79,5.15 52.94,5.3 52.79,5.45 53.4,6.06 53.4,9.72 54.46,10.79 Y1.4
M4_Y2
  Bottom 0.152: MOD_12.5 29.01,107.7 29.01,108.46 29.47,108.92 29.47,109.68 40.14,120.35 67.88,120.35 70.01,118.22 70.01,117.61 69.86,117.46 69.86,116.85 69.71,116.69 69.86,116.54 69.25,115.93 69.25,112.27 68.18,111.21 Y2.4
M4_Y3
  Bottom 0.152: MOD_16.5 108.27,93.25 109.03,93.25 109.48,92.79 110.25,92.79 120.91,82.12 120.91,54.39 118.78,52.25 118.17,52.25 118.02,52.41 117.41,52.41 117.26,52.56 117.1,52.41 116.5,53.02 112.84,53.02 111.77,54.08 Y3.4

## Text on the board
tNames: O | - | + | P | BU | B | X | Y | X | Y | BU | B | + | P | O | - | - | + | O | 4 | 3 | 2 | 1 | 4 | 3 | 2 | 1 | P | B | X | BU | 1 | 4 | Y | Y | 2 | 3 | BU | X | 4 | 3 | 2 | 1 | 4 | 3 | 2 | 1 | B | 3 | (-) | (+) | 2 | P | 4 | 1 | O | + | - | - | + | O | P | B | X | BU | Y | Y | BU | X | B | 1 | 4 | O | P | 3 | 2 | + | - | 3 | 2 | 4 | 1 | - | + | O | P | B | 1 | 1 | 4 | 4 | X | BU | Y | 2 | 2 | 3 | 3 | Y | 3 | 3 | 2 | 2 | BU | X | B | 4 | 4 | 1 | 1 | P | O | + | - | (+) | (-) | (-) | (+) | - | + | O | P | B | 1 | 1 | 4 | 4 | X | 2 | 2 | 3 | 3 | BU | Y | Y | 3 | 3 | 2 | 2 | BU | 4 | 4 | 1 | 1 | X | B | P | O | + | - | 1 | 4 | 2 | 3 | - | + | 3 | 2 | O | P | 4 | 1 | B | X | BU | Y | Y | BU | B | X | P | O | + | - | - | + | O | 1 | 4 | P | B | 2 | (+) | (-) | 1 | 2 | 3 | 4 | 3 | X | 3 | 1 | 2 | 3 | 4 | 2 | BU | Y | Y | 4 | 1 | BU | X | B | 1 | 2 | 3 | 4 | P | 1 | 2 | 3 | 4 | O | + | - | - | + | O | B | X | P | BU | Y | BU | Y | X | P | O | B | + | -